# Altium PCB phDoser.PcbDoc
Units mm, origin at the board's own origin, x right, y up, seen from the top; angles counter-clockwise.
Board outline 46 x 30 mm, 2 copper layers (Top Layer, Bottom Layer); 28 components, 19 nets, 104 pads, 4 vias.
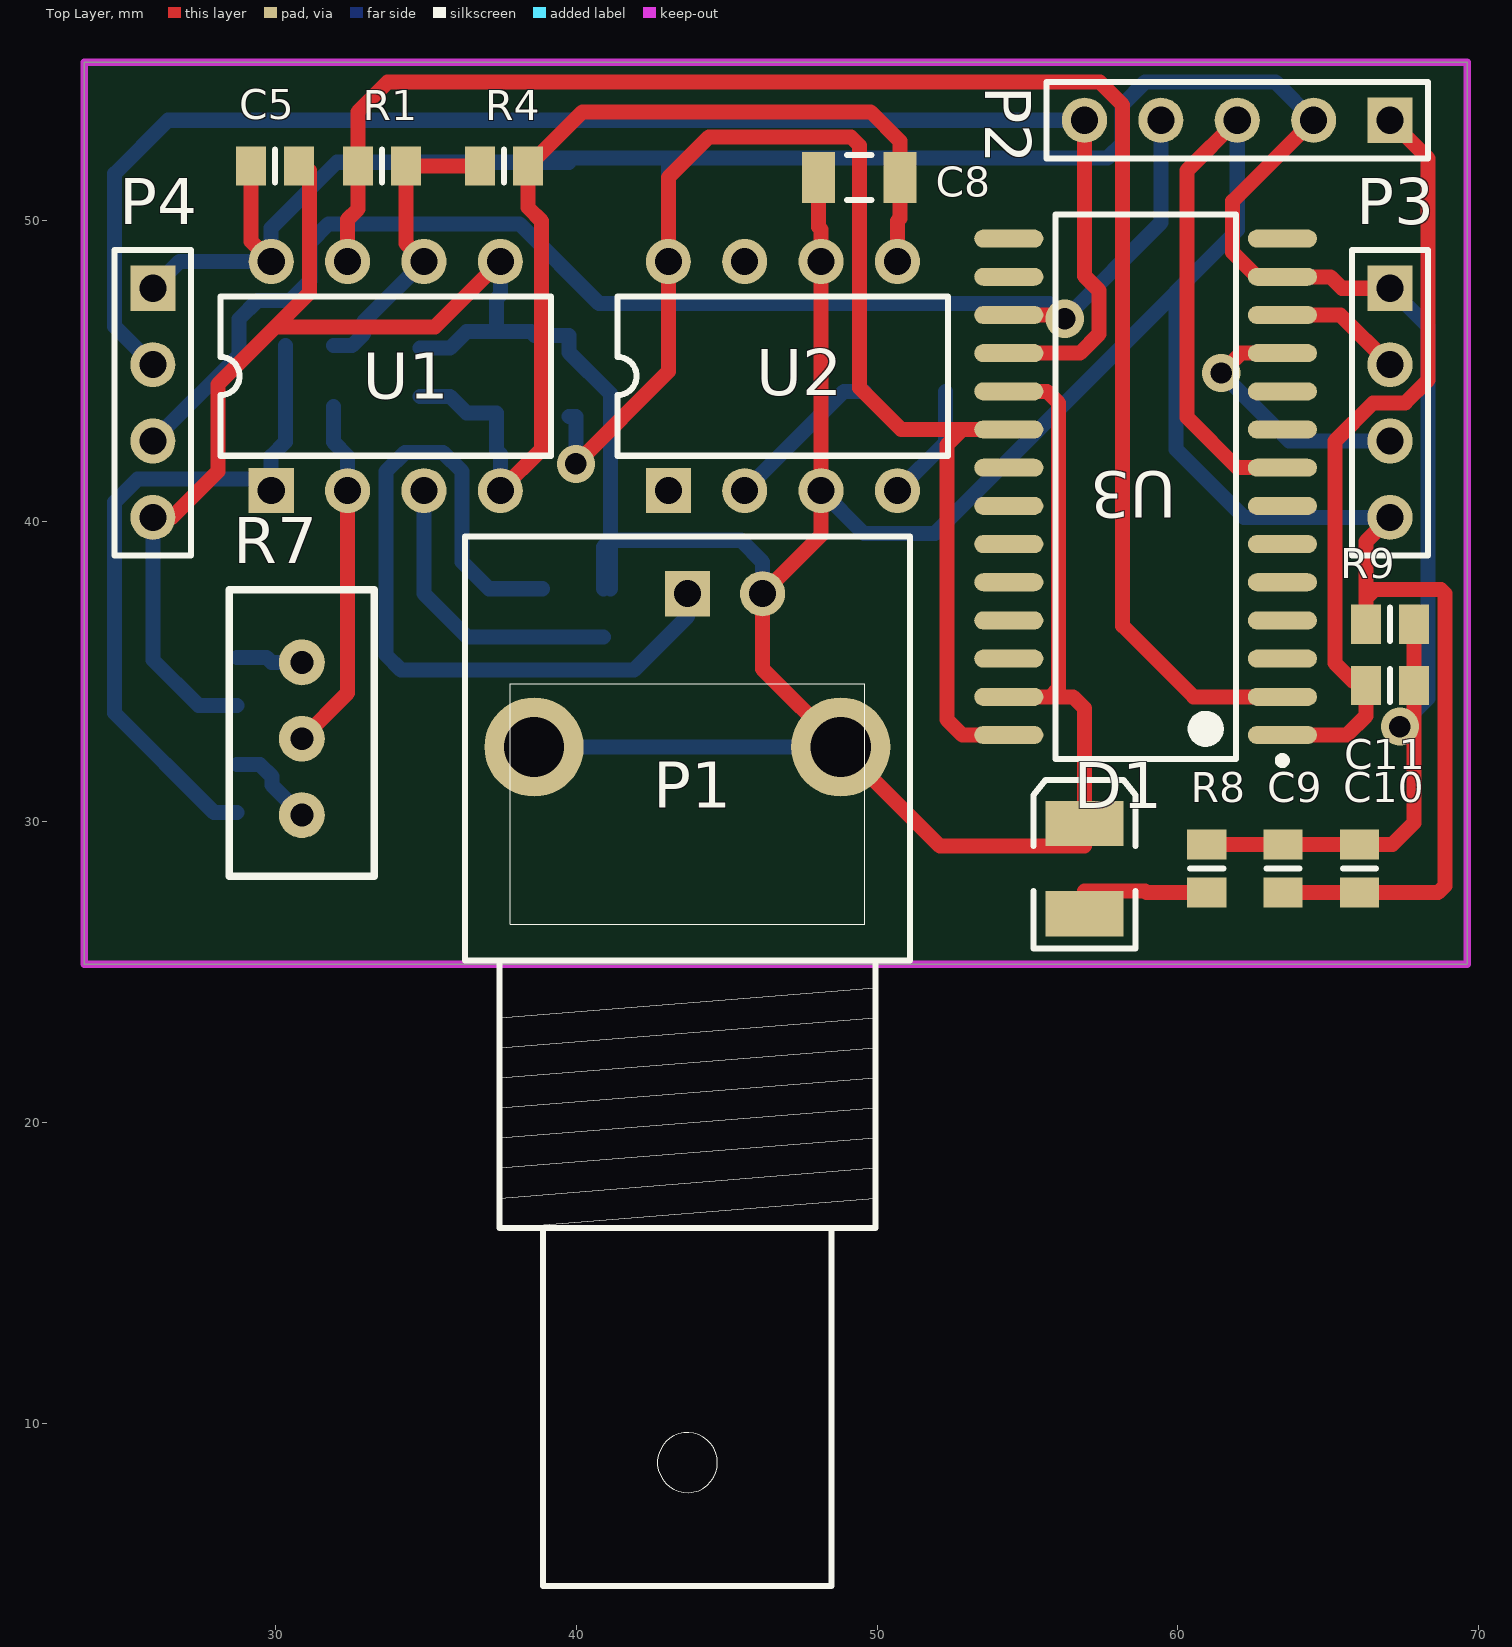
[diagram p0: Top Layer view]
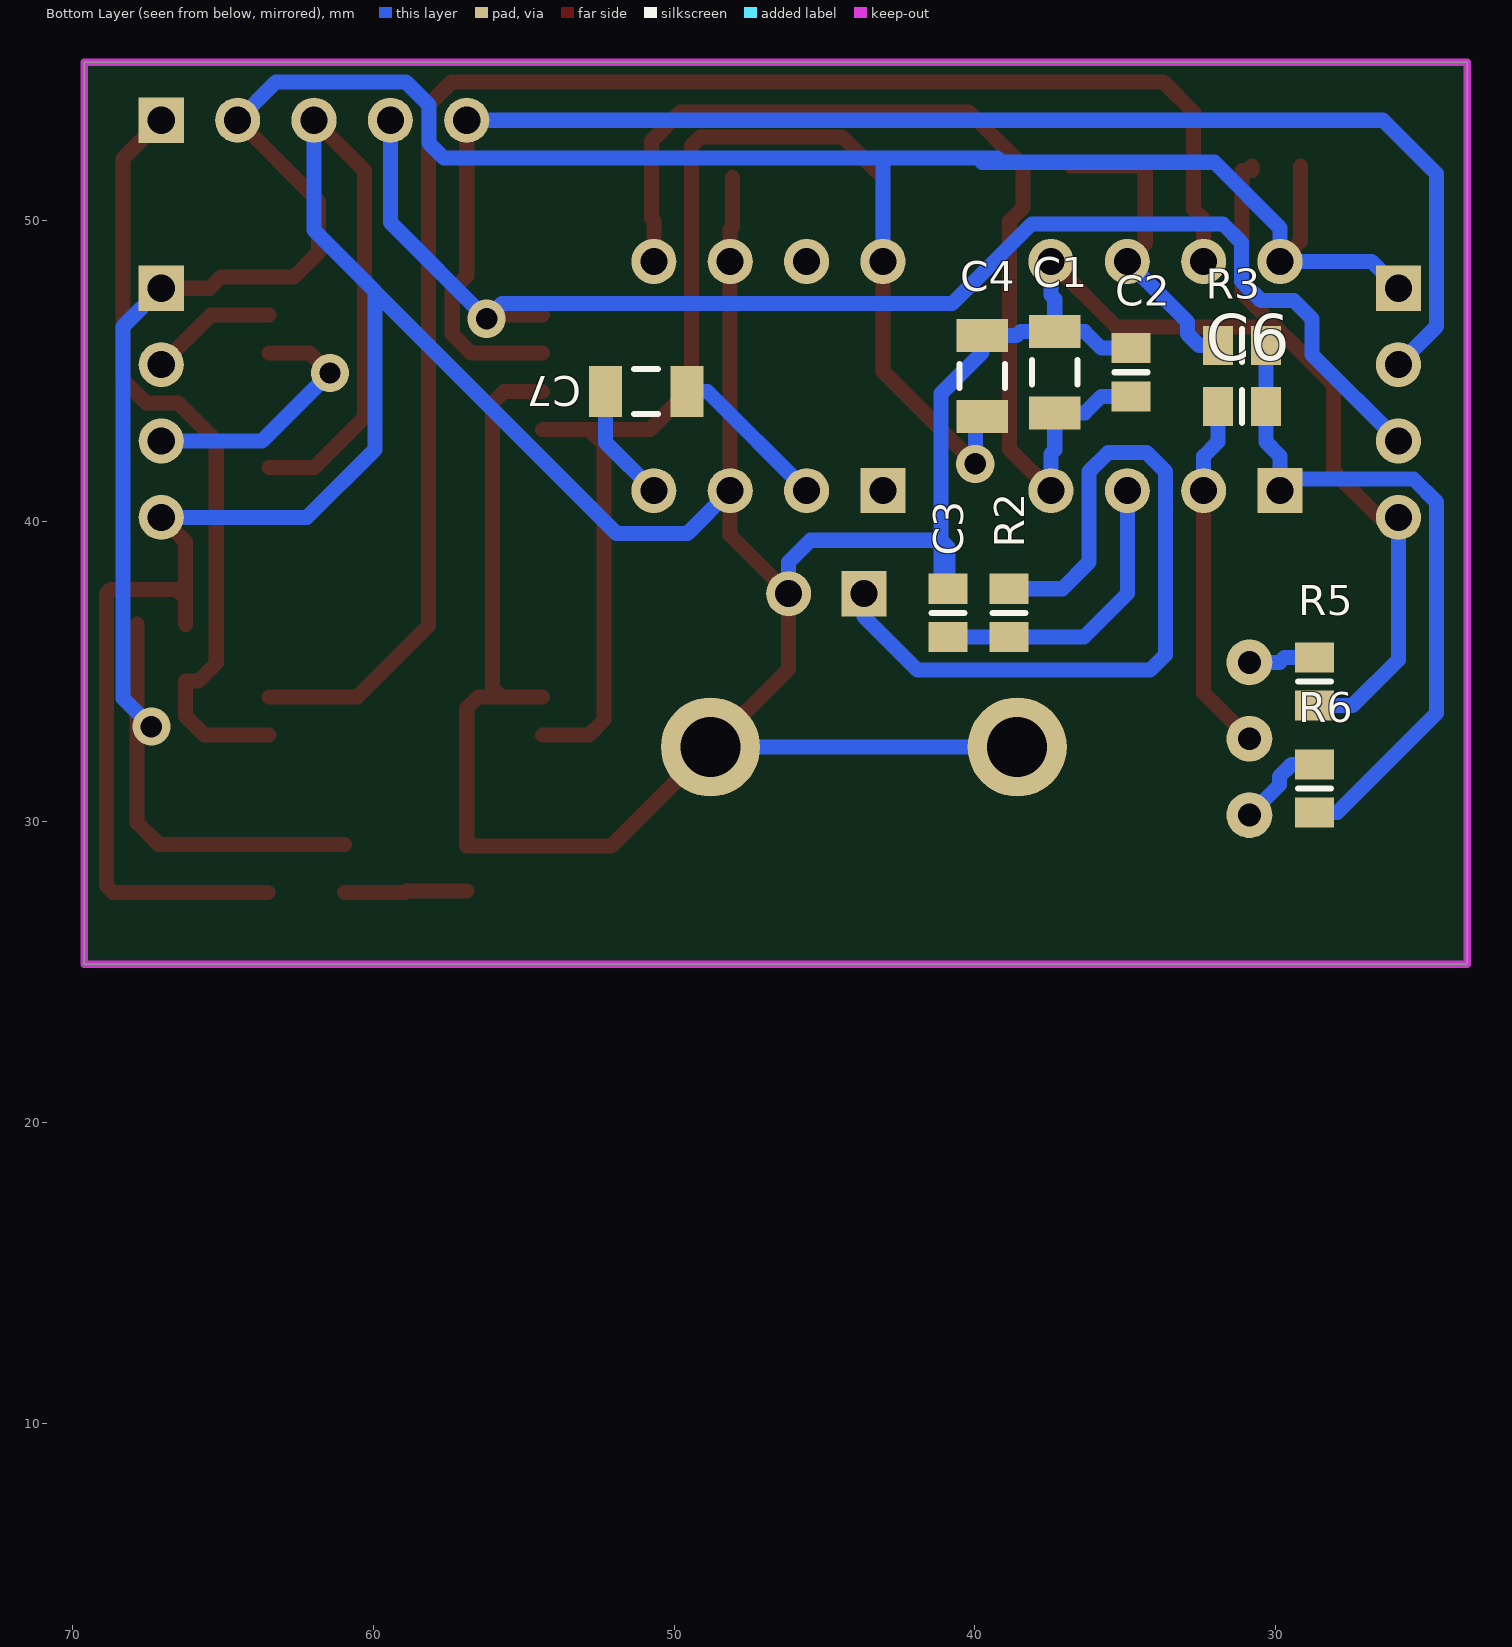
[diagram p1: Bottom Layer view, seen from below]

## Layer stack, top to bottom
Top Layer: signal copper 0.0356
Dielectric: dielectric 0.32, FR-4, Dk 4.8
Bottom Layer: signal copper 0.0356

## Board outline
23.622,55.273 69.622,55.273 69.622,25.273 23.622,25.273

## Design rules (kind name [scope] priority, off if disabled: settings)
Clearance [All] p1: gap=0.254
PolygonConnect [All] p1: connectstyle=Relief reliefconductorwidth=0.254 reliefentries=4 polygonreliefangle="90 Angle"
RoomDefinition DoserController [InComponentClass('DoserController')] p1: confinementstyle=ConfineIn formatcopy=TRUE lockcomponents=FALSE outline 23.622,25.273 69.215,25.273 69.215,55.273 23.622,55.273
RoomDefinition pHCircuit [InComponentClass('pHCircuit')] p2: confinementstyle=ConfineIn formatcopy=TRUE lockcomponents=FALSE outline 23.622,25.273 69.215,25.273 69.215,55.273 23.622,55.273
RoutingVias [All] p1: holewidth=0.711 width=1.27 viastyle="Through Hole" minholewidth=0.711 minwidth=1.27 maxholewidth=0.711 maxwidth=1.27
SilkscreenOverComponentPads [All] p1: minsilkscreentomaskgap=0.254
SolderMaskExpansion [All] p1: expansion=0.102
Width -5 [InNet('-5VISO')] p1: maxlimit=5 minlimit=0.254 preferedwidth=0.5 minimp=50.000000 maximp=50.000000 favimp=50.000000
Width +5 [InNet('+5VISO')] p2: maxlimit=5 minlimit=0.254 preferedwidth=0.5 minimp=50.000000 maximp=50.000000 favimp=50.000000
Width GND2 [InNet('GND2')] p3: maxlimit=5 minlimit=0.254 preferedwidth=0.5 minimp=50.000000 maximp=50.000000 favimp=50.000000
Width [All] p4: maxlimit=5 minlimit=0.254 preferedwidth=0.5 minimp=50.000000 maximp=50.000000 favimp=50.000000
27 further rules are at their usual default settings.

## Classes and differential pairs
component class DoserController: C9 C10 C11 D1 P2 P3 P4 R8 R9 U3
component class pHCircuit: C1 C2 C3 C4 C5 C6 C7 C8 J? P1 R1 R2 R3 R4 R5 R6 R7 U1 U2

## Components (designator, comment, footprint, x,y, rotation, side; value= is the part's Value field where it differs from the comment)
C1 "Cap2" CAPC3216L 37.338,44.958 r270 bottom
C2 "Cap Semi" RESC2012L 34.798,44.958 r270 bottom
C3 "Cap Semi" RESC2012L 40.894,36.957 r270 bottom
C4 "Cap2" CAPC3216L 39.751,44.831 r90 bottom
C5 "Cap Semi" RESC2012L 29.972,51.816 r180 top
C6 "Cap Semi" RESC2012L 31.115,43.815 r0 bottom
C7 "Cap2" CAPC3216L 50.927,44.323 r0 bottom
C8 "Cap2" CAPC3216L 49.403,51.435 r0 top
C9 "Cap" RESC2012L 63.5,28.448 r90 top
C10 "Cap" RESC2012L 66.04,28.448 r90 top
C11 "Cap" RESC2012L 67.056,36.576 r0 top
D1 "LED2" DSO-C2/D5.6 56.896,28.448 r90 top
P1 "BNC" "BNC_RA CON" 43.688,37.592 r90 top
P2 "Header 5" HDR1X5 67.056,53.34 r180 top
P3 "Header 4" HDR1X4 67.056,47.752 r270 top
P4 "Header 4" HDR1X4 25.908,47.752 r270 top
R1 "Res1" RESC2012L 33.528,51.816 r0 top
R2 "Res1" RESC2012L 38.862,36.957 r90 bottom
R3 "Res1" RESC2012L 31.115,45.847 r180 bottom
R4 "Res1" RESC2012L 37.592,51.816 r180 top
R5 "Res1" RESC2012L 28.702,34.671 r270 bottom
R6 "Res1" RESC2012L 28.702,31.115 r90 bottom
R7 "5k" R25_turn_Top 33.274,37.719 r180 top
R8 "Res1" RESC2012L 60.96,28.448 r90 top
R9 "Res Semi" RESC2012L 67.056,34.544 r0 top
U1 "TL072ACN" DIP8 33.655,44.831 r0 top
U2 "ICL7660S" DIP8 46.863,44.831 r0 top
U3 "DSPIC30F2020-30I/SO" SOIC-SO28_N 58.928,41.148 r180 top

## Footprints (in the part's own frame and the unit in brackets; to place one, negate y for a bottom-side part, rotate by r counter-clockwise, add the part's x,y. Pads: shape width x height; smd on the part's side, far side on the other; paste and mask are expansions set on the pad)
"BNC_RA CON" [mm] "Connector; BNC Elbow"
  rect 1.5x1.5 hole 0.9: 1(0,0)
  round 3.3 hole 2: 2(-5.1,-5.1) 2(-5.1,5.1)
  round 1.5 hole 0.9: 2(0,-2.5)
  silkscreen extent -33,-7.4 1.9,7.4
CAPC3216L [mm] "Chip Capacitor, Body 3.2x1.6mm, IPC High Density"
  rect 1.1x1.7 smd: 1(-1.35,0) 2(1.35,0)
  silkscreen extent -0.4,-0.75 0.4,0.75, body extent -1.7,-0.9 1.7,0.9, height 1.3
DIP8 [mm] "DIP; 8 Leads; Row Spacing 7.62 mm; Pitch 2.54 mm"
  rect 1.5x1.5 hole 0.9: 1(-3.81,-3.81)
  round 1.5 hole 0.9: 2(-1.27,-3.81) 3(1.27,-3.81) 4(3.81,-3.81) 5(3.81,3.81) 6(1.27,3.81) 7(-1.27,3.81) 8(-3.81,3.81)
  silkscreen extent -5.5,-2.65 5.5,2.65
DSO-C2/D5.6 [mm] "SM LED; 2 C-Bend Leads; Body 3.5 x 2.8 x 1.9 mm, inc leads (LxWxH typ)"
  rect 1.5x2.6 smd: 1(-1.5,0) 2(1.5,0)
  silkscreen extent -2.65,-1.7 2.95,1.7
HDR1X4 [mm] "Connector; Header; 4 Position"
  rect 1.5x1.5 hole 0.9: 1(0,0)
  round 1.5 hole 0.9: 2(2.54,0) 3(5.08,0) 4(7.62,0)
  silkscreen extent -1.27,-1.27 8.89,1.27
HDR1X5 [mm] "Connector; Header; 5 Position"
  rect 1.5x1.5 hole 0.9: 1(0,0)
  round 1.5 hole 0.9: 2(2.54,0) 3(5.08,0) 4(7.62,0) 5(10.16,0)
  silkscreen extent -1.27,-1.27 11.43,1.27
R25_turn_Top [mil] "R25_turn_Top"
  round 60 hole 30: 1(94.88,94.88) 2(94.88,294.88) 3(94.88,194.88)
  silkscreen extent 0,0 190,375
RESC2012L [mm] "Chip Resistor, Body 2.0x1.3mm, IPC High Density"
  rect 1x1.3 smd: 1(-0.8,0) 2(0.8,0)
  silkscreen extent 0,-0.55 0,0.55, body extent -1.07,-0.7 1.07,0.7, height 2.54
SOIC-SO28_N [mm] "SOIC, 28-Leads, Body 17.9x7.5mm, Pitch 1.27mm, IPC Medium Density"
  oval 2.3x0.6 smd: 1(-4.55,8.255) 2(-4.55,6.985) 3(-4.55,5.715) 4(-4.55,4.445) 5(-4.55,3.175) 6(-4.55,1.905) 7(-4.55,0.635) 8(-4.55,-0.635) 9(-4.55,-1.905) 10(-4.55,-3.175) 11(-4.55,-4.445) 12(-4.55,-5.715) 13(-4.55,-6.985) 14(-4.55,-8.255) 15(4.55,-8.255) 16(4.55,-6.985) 17(4.55,-5.715) 18(4.55,-4.445) 19(4.55,-3.175) 20(4.55,-1.905) 21(4.55,-0.635) 22(4.55,0.635) 23(4.55,1.905) 24(4.55,3.175) 25(4.55,4.445) 26(4.55,5.715) 27(4.55,6.985) 28(4.55,8.255)
  silkscreen extent -4.67,-9.05 3,9.23, body extent -3.8,-9.06 3.8,9.06, height 2.65

## Part data
C1 C4 C7 C8 C9 C10 C11: "Capacitor"
C2 C3 C5 C6: "Capacitor (Semiconductor SIM Model)"
D1: "Typical RED, GREEN, YELLOW, AMBER GaAs LED"
P1: "BNC Elbow Connector"
P2: "Header, 5-Pin"
P3 P4: "Header, 4-Pin"
R1 R2 R3 R4 R5 R6 R8: "Resistor"
R7: library part R25_turn
R9: "Semiconductor Resistor"
U1: "Low-Noise J-FET Dual Operational Amplifier"
U3: "High-Performance 16-bit Digital Signal Controller with Switch Mode Power Supply, 12 KB Flash, 512 Byte SRAM, 28-Pin SOIC, Industrial Temperature"

## Via types
v1: diameter 1.27, hole 0.711, Top Layer to Bottom Layer, 4 vias

## Nets (pads, with @x,y where several pads share a name; then routed paths per layer and width w, separated by ;. In a path a pad name is that pad's centre, name@x,y a point inside that pad or via, vN(x,y) a via of type N, cw(c..) or ccw(c..) an arc to the next point about the centre after c; other vN are vias at no path point)
+5VISO: C4.1 C5.2 C9.2 C10.2 C11.2 P2.2 P3.1 P4.1 R8.2 R9.2 U1.8 U2.8 U3.13 U3.20 U3.28 | length 137.5
  Top Layer w0.5: C5.2 29.172,49.314 U1.8 ; v1(39.98,41.91) 43.053,44.983 43.053,51.435 44.407,52.789 49.124,52.789 49.419,52.494 49.419,44.434 50.8,43.053 52.832,43.053 ; U3.28 52.832,32.893 52.324,33.401 52.324,42.545 52.832,43.053 ; U3.20 52.832,43.053 ; R8.2 C9.2 C10.2 67.132,29.248 67.856,29.972 67.856,33.642 ; P2.2 61.824,50.648 61.824,48.945 62.636,48.133 U3.13 65.075,48.133 65.456,47.752 P3.1 ; v1(67.386,33.172) 67.856,33.642 ; C11.2 R9.2 67.856,33.642
  Bottom Layer w0.5: P4.1 26.797,48.641 U1.8 29.845,49.76 32.028,51.943 39.116,51.943 ; C4.1 39.98,43.481 v1(39.98,41.91) ; 39.751,51.943 39.116,51.943 ; U2.8 43.053,52.086 ; P2.2 63.246,54.61 58.912,54.61 58.15,53.848 58.15,52.578 57.658,52.086 43.053,52.086 ; P3.1 68.326,46.482 68.326,34.112 v1(67.386,33.172) ; 39.116,51.943 39.259,52.086 43.053,52.086
-5VISO: C1.2 C2.2 C8.2 R4.1 U1.4 U2.5 | length 34.5
  Top Layer w0.5: U1.4 38.837,42.393 38.837,49.987 38.392,50.432 R4.1 40.195,53.619 49.785,53.619 50.753,52.651 C8.2 50.753,50.067 50.673,49.987 U2.5
  Bottom Layer w0.5: C2.2 35.789,44.158 36.339,43.608 C1.2 37.338,42.367 37.465,42.24 U1.4
GND2: C1.1 C2.1 C3.1 C4.2 C5.1 C8.1 C9.1 C10.1 C11.1 D1.2 P1.2 P2.3 P3.4 P4.4 R5.2 U1.5 U2.3 U2.6 U3.8 U3.19 U3.27 | length 187.2
  Top Layer w0.5: P4.4 26.543,40.132 28.067,41.656 28.067,44.552 31.115,47.6 31.115,51.664 30.772,51.664 C5.1 ; 29.985,46.469 35.293,46.469 U1.5 ; C8.1 48.053,49.785 48.133,49.705 U2.6 U2.3 48.133,39.537 46.188,37.592 46.188,35.092 48.788,32.492 52.082,29.198 56.896,29.198 56.896,33.782 56.515,34.163 U3.27 ; U3.19 55.651,44.323 56.032,43.942 56.032,34.442 55.753,34.163 ; P2.3 60.3,51.664 60.3,43.459 61.976,41.783 U3.8 ; C9.1 C10.1 68.656,27.648 68.885,27.877 68.885,37.592 68.745,37.732 66.548,37.732 66.256,37.44 ; C11.1 66.256,37.44 ; P3.4 66.256,39.332 66.256,37.44
  Bottom Layer w0.5: P4.4 25.908,35.395 27.432,33.871 R5.2 ; C2.1 35.789,45.758 36.339,46.308 C1.1 ; U1.5 37.465,47.523 37.338,47.396 C1.1 ; P1.2@38.588,32.492 40.482,32.492 40.488,32.487 48.783,32.487 P1.2@48.788,32.492 ; C3.1 40.894,39.141 41.123,39.37 45.466,39.37 46.188,38.648 P1.2@46.188,37.592 ; C3.1@41.123,37.757 41.123,44.247 39.751,45.618 C4.2 38.608,46.181 38.481,46.308 C1.1 ; U2.3 49.555,39.599 51.918,39.599 59.944,47.625 59.944,42.393 62.205,40.132 P3.4 ; 59.944,47.65 61.976,49.682 P2.3
NetC3_2: C3.2 R2.1 U1.3 | length 10
  Bottom Layer w0.5: U1.3 34.925,37.592 36.36,36.157 R2.1 C3.2
NetC6_1: C6.1 R3.2 R6.1 U1.1 | length 23.4
  Bottom Layer w0.5: R6.1 27.94,30.315 24.638,33.617 24.638,40.64 25.4,41.402 U1.1@29.845,41.402 ; R3.2 C6.1 30.315,42.634 29.845,42.164 U1.1@29.845,41.402 ; U1.1@29.845,41.402 U1.1 U1.1@29.845,41.402
NetC6_2: C6.2 R7.3 U1.2 | length 11.9
  Top Layer w0.5: R7.3 32.385,34.29 U1.2
  Bottom Layer w0.5: C6.2 31.915,42.634 32.385,42.164 U1.2
NetC7_1: C7.1 U2.2 | length 5.4
  Bottom Layer w0.5: U2.2 48.895,44.323 C7.1
NetC7_2: C7.2 U2.4 | length 4
  Bottom Layer w0.5: U2.4 52.277,42.625 C7.2
NetD1_1: D1.1 R8.1 | length 4.1
  Top Layer w0.5: D1.1@56.896,27.698 58.903,27.698 58.953,27.648 R8.1
NetP1_1: P1.1 R2.2 | length 26.9
  Bottom Layer w0.5: R2.2 37.084,37.757 36.195,38.646 36.195,41.656 35.56,42.291 34.29,42.291 33.655,41.656 33.655,35.56 34.163,35.052 41.91,35.052 43.688,36.83 P1.1
NetP2_1: P2.1 R9.1 U3.1 | length 26
  Top Layer w0.5: U3.1 65.621,32.893 66.256,33.528 R9.1 66.256,34.696 65.811,34.696 65.227,35.281 65.227,42.672 66.497,43.942 67.564,43.942 68.326,44.704 68.326,52.07 P2.1
NetP2_4: P2.4 P4.3 U3.17 | length 46.9
  Top Layer w0.5: U3.17 56.109,46.863 v1(56.236,46.736)
  Bottom Layer w0.5: P4.3 28.778,45.542 28.778,46.736 29.388,47.346 30.48,47.346 31.131,47.997 31.131,49.276 31.75,49.895 38.1,49.895 40.751,47.244 55.728,47.244 v1(56.236,46.736) 59.436,49.936 59.436,52.332 ; 59.436,52.332 P2.4 59.436,52.332
NetP2_5: P2.5 P4.2 U3.18 | length 50.4
  Top Layer w0.5: U3.18 56.743,45.593 57.378,46.228 57.378,47.676 56.896,48.158 P2.5
  Bottom Layer w0.5: P4.2 24.638,46.482 24.638,51.562 26.416,53.34 P2.5
NetP3_2: P3.2 U3.12 | length 4.3
  Top Layer w0.5: U3.12 65.405,46.863 P3.2
NetP3_3: P3.3 U3.11 | length 8.9
  Top Layer w0.5: v1(61.443,44.933) 62.103,45.593 U3.11
  Bottom Layer w0.5: v1(61.443,44.933) 63.703,42.672 P3.3
NetR1_1: R1.1 U1.7 U3.2 | length 54.9
  Top Layer w0.5: U1.7 32.385,50.038 32.728,50.381 R1.1 32.728,53.619 33.719,54.61 57.404,54.61 58.166,53.848 58.166,36.525 60.528,34.163 U3.2
NetR1_2: R1.2 R3.1 R4.2 U1.6 | length 10.3
  Top Layer w0.5: U1.6 34.328,49.238 R1.2 R4.2
  Bottom Layer w0.5: R3.1 32.537,45.847 32.918,46.228 32.918,46.634 U1.6
NetR5_1: R5.1 R7.1 | length 2.2
  Bottom Layer w0.5: R5.1 29.693,35.471 29.855,35.309 R7.1
NetR6_2: R6.2 R7.2 | length 3
  Bottom Layer w0.5: R6.2 29.464,31.915 29.87,31.509 29.87,31.223 R7.2
pads on no net: U2.1 U2.7 U3.3 U3.4 U3.5 U3.6 U3.7 U3.9 U3.10 U3.14 U3.15 U3.16 U3.21 U3.22 U3.23 U3.24 U3.25 U3.26

## Keep-outs
Keep-Out Layer:
  the board outline again, w0.254